# Altium PCB EtherWiz_3K4KNic.PcbDoc (part 2 of 2)
Units mil, origin at the board's own origin, x right, y up, seen from the top; angles counter-clockwise.
Board outline 3909 x 1834 mil, 4 copper layers (Top Layer, GND, 5V, Bottom Layer), stack 62.295 mil thick; 71 components, 121 nets, 446 pads, 217 vias.
Unrouted connection lines stored in the file: 7.
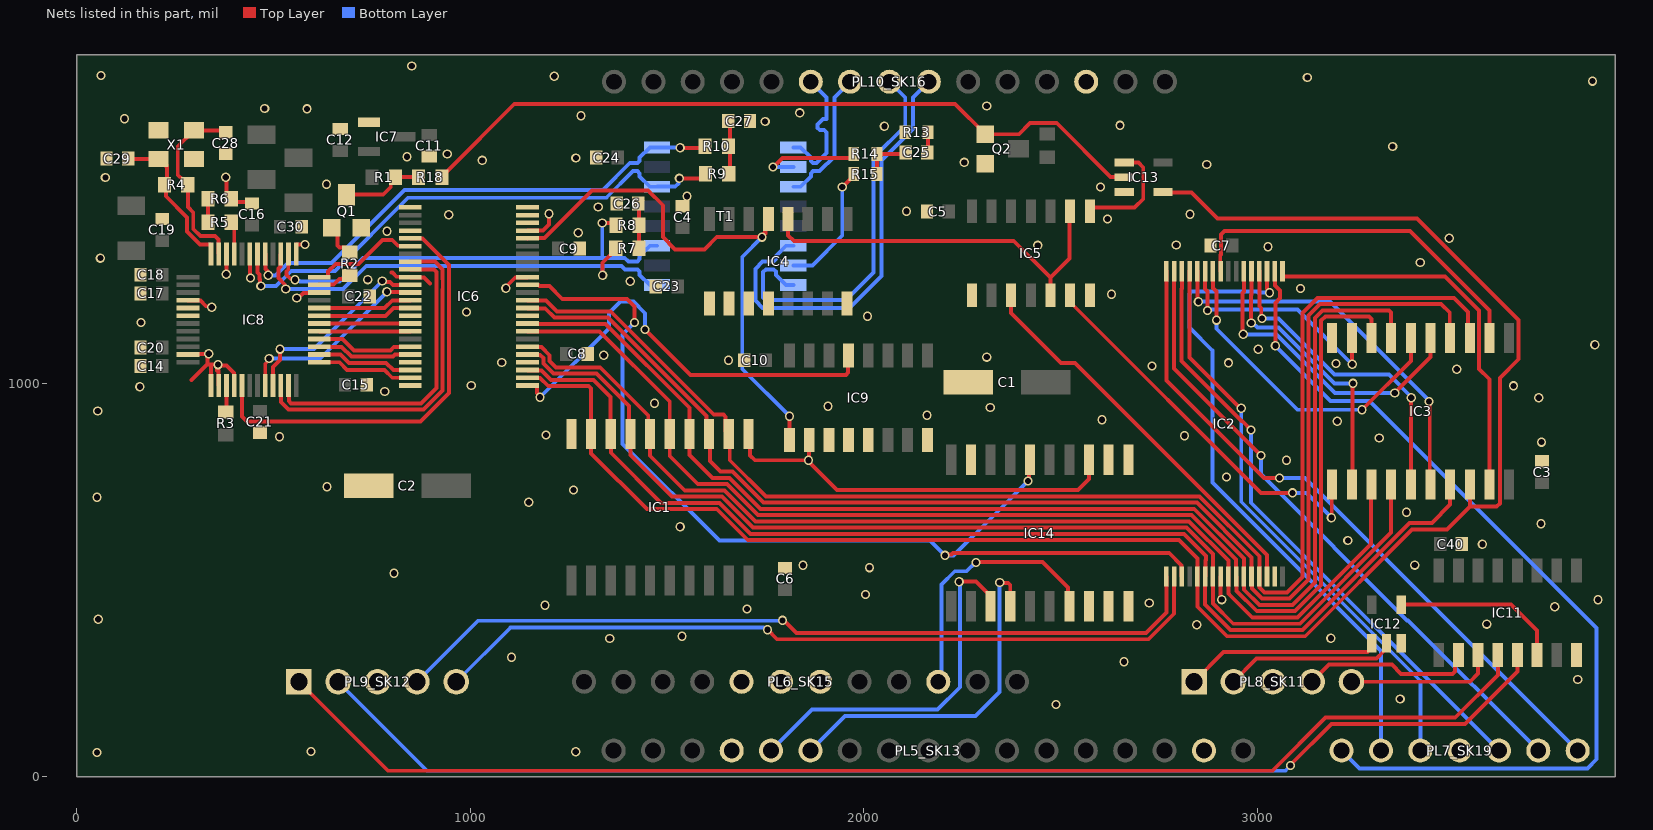
[diagram p4: the nets of this part, all layers, seen from the top]

## Via types
v1: diameter 23.62, hole 15.75, Top Layer to Bottom Layer, tented both sides, 217 vias

## Nets (pads, with @x,y where several pads share a name; then routed paths per layer and width w, separated by ;. In a path a pad name is that pad's centre, name@x,y a point inside that pad or via, vN(x,y) a via of type N, cw(c..) or ccw(c..) an arc to the next point about the centre after c; other vN are vias at no path point) (continued)
BLA3: IC2.19 IC6.14 IC14.16 | length 2582.9
  Top Layer w10: IC6.14@1145.43,1249.77 1146.34,1248.87 1173.36,1248.87 1175.33,1246.9 1200.58,1246.9 1233.39,1214.09 1397.91,1214.09 1417,1195 v1(1417,1154) ; v1(2206,562.13) 2208.61,564.74 2222.86,564.74 2226.16,568.04 2776.08,568.04 2807.15,536.97 2807.15,509.74 IC2.19@2808.06,508.83 ; v1(2417,751) 2419.5,753.5 2419.5,802.52 IC14.16@2422,805.02
  Bottom Layer w10: v1(1417,1154) 1386.91,1123.91 1386.91,845.59 1632.67,599.82 2168.32,599.82 v1(2206,562.13) 2228.13,562.13 2322.57,656.57 v1(2417,751)
BLA12: IC2.31 IC4.1 IC14.11
BLA13: IC4.2 IC5.1 IC14.12
BPR/W: IC1.1 IC9.2 IC14.13 | length 1068.4
  Top Layer w10: IC1.1@1706.6,870.57 1710.95,866.22 1710.95,816.05 1723,804 v1(1859,804) ; IC9.2@1861.2,855.29 1860.1,854.19 1860.1,805.1 v1(1859,804) ; IC14.13@2572,805.02 2572,756 2544,728 1932,728 1859,801 v1(1859,804)
CLK2: PL5_SK13.4
D0: IC1.9 IC2.21 IC3.18 IC6.2 IC13.4 | length 4631
  Top Layer w10: IC6.2@1145.43,1013.55 1146.34,1012.65 1177.37,1012.65 1197.73,992.28 1300.74,992.28 1306.6,986.43 IC1.9@1306.6,870.57 1306.6,821.4 1448.43,679.57 1625.98,679.57 1704.79,600.76 2800.49,600.76 2847.43,553.82 IC2.21@2847.43,508.83 2847.43,431.57 2922.34,356.66 3121.66,356.66 3393.44,628.44 3482.23,628.44 3539.94,686.15 ; IC13.4@2760.21,1485.6 2761.81,1484 2833,1484 2898.99,1418.01 3405.49,1418.01 3663.65,1159.85 3663.65,1060.65 3616.24,1013.24 3616.24,694.24 3608.15,686.15 3539.94,686.15 ; IC3.18@3539.94,742.49 3539.94,686.15
D1: IC1.8 IC2.22 IC3.17 IC6.3 | length 2959.2
  Top Layer w10: IC6.3@1145.43,1033.24 1146.34,1032.33 1180.18,1032.33 1204.32,1008.19 1312.81,1008.19 1355.9,965.1 1355.9,871.28 1356.95,870.22 1356.95,823.05 1484.53,695.47 1632.57,695.47 1711.38,616.66 2813.25,616.66 2869.08,560.83 2869.08,550.49 2868.02,549.43 2868.02,509.74 IC2.22@2867.11,508.83 2867.11,437.52 2932.07,372.57 3115.07,372.57 3386.85,644.35 3443.35,644.35 3489.94,690.94 IC3.17@3489.94,742.49
D2: IC1.7 IC2.23 IC3.14 IC6.5 | length 2848.6
  Top Layer w10: IC6.5@1145.43,1072.61 1146.34,1071.7 1177.02,1071.7 1185.37,1063.34 1185.37,1049.63 1210.91,1024.09 1320.91,1024.09 1402.9,942.1 1402.9,874.28 IC1.7@1406.6,870.57 1406.6,817.4 1512.62,711.38 1639.15,711.38 1717.96,632.57 2819.84,632.57 2886.8,565.61 IC2.23@2886.8,508.83 2886.8,440.33 2938.65,388.47 3108.49,388.47 3339.94,619.93 IC3.14@3339.94,742.49
D3: IC1.6 IC2.25 IC3.13 IC6.6 | length 2772.3
  Top Layer w10: IC6.6@1145.43,1092.29 1146.34,1091.39 1180.61,1091.39 1201.28,1070.72 1201.28,1056.21 1217.49,1040 1330,1040 1451.9,918.1 1451.9,875.28 IC1.6@1456.6,870.57 1456.6,815.4 1544.72,727.28 1645.74,727.28 1724.55,648.47 2826.43,648.47 2926.17,548.73 IC2.25@2926.17,508.83 2926.17,465.21 2932.23,459.15 2932.23,459.09 2986.94,404.38 3101.9,404.38 3288.96,591.44 3288.96,741.5 IC3.13@3289.94,742.49
D4: IC1.5 IC2.26 IC3.8 IC6.8 | length 3321.4
  Top Layer w10: IC6.8@1145.43,1131.66 1328.46,1131.66 1506.6,953.53 IC1.5@1506.6,870.57 1506.6,814.4 1577.81,743.19 1652.33,743.19 1731.14,664.38 2833.01,664.38 2945.85,551.54 IC2.26@2945.85,508.83 2946.76,507.93 2946.76,471.94 2998.41,420.28 3095.31,420.28 3162.19,487.16 3162.19,1158.7 3172.59,1169.09 3284.09,1169.09 3289.94,1163.24 IC3.8@3289.94,1114.54
D5: IC1.4 IC2.27 IC3.7 IC6.9 | length 3377.2
  Top Layer w10: IC6.9@1145.43,1151.35 1146.31,1150.47 1343.41,1150.47 1556.6,937.29 IC1.4@1556.6,870.57 1556.6,817.19 1614.69,759.09 1658.92,759.09 1737.73,680.28 2839.6,680.28 2965.54,554.35 IC2.27@2965.54,508.83 ; IC2.27@2965.95,508.42 2966.44,507.93 2966.44,474.75 3005,436.19 3088.72,436.19 3146.28,493.75 3146.28,1165.28 3166,1185 3334.09,1185 3339.94,1179.14 IC3.7@3339.94,1114.54
D6: IC1.3 IC2.28 IC3.4 IC6.11 | length 3533.3
  Top Layer w10: IC6.11@1145.43,1190.72 1146.34,1189.81 1190.19,1189.81 1213.62,1166.38 1350,1166.38 1600,916.38 1600,877.17 1609,868.17 1609,802 1636,775 1665.51,775 1744.32,696.19 2846.19,696.19 2985.22,557.16 IC2.28@2985.22,508.83 2986.13,507.93 2986.13,477.56 3011.59,452.09 3082.13,452.09 3130.38,500.34 3130.38,1171.87 3159.41,1200.91 3186.91,1200.91 3467.09,1200.91 3488.87,1179.13 IC3.4@3488.87,1115.61
D7: IC1.2 IC2.29 IC3.3 IC6.12 | length 3587.7
  Top Layer w10: IC6.12@1145.43,1210.4 1192.09,1210.4 1220.21,1182.28 1356.59,1182.28 1618.47,920.4 1642.95,920.4 1648.8,914.54 1648.8,878.37 IC1.2@1656.6,870.57 ; IC1.2@1659,870.57 1659,804 1750.91,712.09 2852.78,712.09 3004.91,559.97 IC2.29@3004.91,508.83 3005.81,507.93 3005.81,480.7 3018.51,468 3075.54,468 3114.47,506.93 3114.47,1178.46 3152.82,1216.81 3499.19,1216.81 3535,1181 3535,1119.48 IC3.3@3539.94,1114.54
ERX_N: IC8.5 R10.2 T1.8 | length 1309.2
  Top Layer w10: IC8.5@478.58,1328.04 478.9,1327.72 478.9,1289.55 483.81,1284.64 483.81,1276.59 v1(486.42,1273.98) ; v1(1533,1598) 1592.47,1598 R10.2@1596.47,1602
  Bottom Layer w10: v1(486.42,1273.98) 486.74,1273.66 504.66,1273.66 536.35,1305.35 647.08,1305.35 832.72,1491 1337,1491 1405,1559 1424.13,1559 1429.99,1564.86 1429.99,1573.13 1455.86,1599 T1.8@1474.36,1599 1474.86,1598.5 1532.5,1598.5 v1(1533,1598)
ERX_P: IC8.6 R9.2 T1.6 | length 1377.2
  Top Layer w10: IC8.6@458.9,1328.04 458.9,1281.27 463.7,1276.46 463.7,1264.57 464.81,1263.46 464.81,1249.31 v1(467.42,1246.71) ; v1(1531,1520.32) 1585.79,1520.32 R9.2@1597.47,1532
  Bottom Layer w10: v1(467.42,1246.71) 505.99,1246.71 544.64,1285.35 655.36,1285.35 841.01,1471 1345.28,1471 1413.28,1539 1424.13,1539 1429.99,1533.14 1429.99,1524.87 1455.86,1499 T1.6@1474.36,1499 1474.86,1499.5 1520.6,1499.5 1528.39,1507.29 1528.39,1517.71 v1(1531,1520.32)
ETX_N: IC8.2 R8.2 T1.3 | length 1182.3
  Top Layer w10: IC8.2@537.64,1328.04 537.64,1304.59 537.05,1304 537.05,1288.17 532.32,1283.45 532.32,1275.16 542.24,1265.24 551.44,1265.24 v1(554.05,1262.64) ; v1(1335,1407) 1364.15,1407 R8.2@1371.41,1399.74
  Bottom Layer w10: v1(554.05,1262.64) 556.65,1260.03 565.43,1260.03 566.72,1258.75 667.66,1258.75 726.91,1318 782.31,1318 782.59,1317.72 801.41,1317.72 801.69,1318 1335,1318 ; v1(1335,1407) 1335,1318 ; T1.3@1474.36,1349 1455.86,1349 1429.99,1323.13 1429.99,1314.86 1424.13,1309 1401.29,1309 1392.29,1318 1335,1318
ETX_P: IC8.3 R7.2 T1.1 | length 1200
  Top Layer w10: IC8.3@517.95,1328.04 517.05,1327.13 517.05,1296.46 512.32,1291.73 512.32,1266.88 528.1,1251.1 528.1,1241.9 v1(530.7,1239.29) ; v1(1336,1274) 1335.24,1274.76 1335.24,1305.81 1369.47,1340.05 R7.2@1369.47,1343
  Bottom Layer w10: v1(530.7,1239.29) 531.25,1238.75 675.95,1238.75 735.2,1298 774.02,1298 774.31,1297.72 809.69,1297.72 809.98,1298 1336,1298 ; v1(1336,1274) 1336,1298 ; T1.1@1474.36,1249 1455.86,1249 1429.99,1274.87 1429.99,1283.14 1424.13,1289 1393.01,1289 1384.01,1298 1336,1298
GND: C1.2 C2.2 C3.1 C4.1 C5.1 C6.1 C7.1 C8.1 C9.1 C10.1 C11.1 C12.1 C14.1 C15.1 C16.1 C17.1 C18.1 C19.1 C20.1 C21.1 C22.1 C23.1 C24.1 C26.1 C27.1 C28.1 C29.1 C30.1 C40.1 IC1.10 IC2.24 IC3.10 IC4.3 IC4.4 IC4.8 IC5.7 IC6.4 IC6.10 IC6.15 IC6.21 IC6.22 IC6.23 IC6.24 IC6.25 IC6.28 IC6.34 IC6.39 IC6.45 IC6.48 IC7.1 IC8.1 IC8.7 IC8.10 IC8.16 IC8.23 IC8.25 IC8.26 IC8.28 IC8.46 IC9.3 IC9.4 IC9.5 IC9.8 IC11.8 IC12.3 IC13.3 IC14.10 IC14.19 PL5_SK13.16 PL6_SK15.5 PL6_SK15.7 PL7_SK19.4 PL8_SK11.3 PL9_SK12.3 PL10_SK16.13 Q1.2 Q2.2 R6.1 R13.1 X1.2 X1.4 | length 1117.5
  Top Layer w10: IC8.23@282.2,1072.61 283.11,1073.51 v1@333.82,1073.51 ; IC8.16@282.2,1210.4 283.11,1209.5 313.79,1209.5 327.99,1195.29 340.15,1195.29 v1(342.76,1192.69) ; 291.57,1007.65 330.94,1047.02 ; v1(334.88,1074.57) v1@333.82,1073.51 ; IC8.25@340.79,994.34 340.79,1047.02 ; 355.9,1032.58 355.9,1044.41 v1(358.5,1047.02) ; 359.57,1032.58 359.57,995.24 IC8.26@360.47,994.34 ; v1(378.19,1523.39) 380.24,1521.35 380.24,1480.01 399.84,1460.4 C16.1@445.12,1460.4 ; v1(379.51,1276.71) 379.84,1277.03 379.84,1327.72 IC8.10@380.16,1328.04 ; IC8.28@399.84,994.34 398.94,995.24 398.94,1025.92 380.45,1044.41 361.11,1044.41 v1(358.5,1047.02) ; IC8.7@439.21,1328.04 440.1,1327.15 440.1,1267.94 v1(440.99,1267.05) ; IC8.1@557.32,1328.04 557.32,1351.17 558.23,1352.07 579.23,1352.07 v1(579.58,1352.42) ; v1(558.81,1216.03) 562.5,1216.03 575.65,1229.18 615,1229.18 IC8.46@615.91,1230.09 ; 799.45,1280.71 801.98,1280.71 812.32,1270.36 846.26,1270.36 IC6.34@847.17,1269.46 848.07,1268.55 882.11,1268.55 897.33,1253.33 ; v1(1090.12,1240.88) 1092.73,1243.48 1092.73,1247.43 1113.85,1268.55 1144.53,1268.55 IC6.15@1145.43,1269.46 ; IC6.21@1145.43,1387.57 1184.44,1387.57 1199.92,1403.05 v1(1199.92,1430.6) ; C4.1@1539,1449.56 1539.66,1449.56 1550.41,1460.31 v1(1550.41,1474.89) ; IC2.24@2906.48,508.83 2906.48,456.46 2909.51,453.43 v1(2909.51,449.74) ; 330.94,1047.02 340.79,1047.02 ; 330.94,1047.02 332.28,1048.35 332.28,1071.97 v1@333.82,1073.51 ; 340.79,1047.02 v1(358.5,1047.02)
  other v1: 51,61 1267.51,63.35 595,64 2488.08,183.06 3362.73,197.41 3814.19,246.69 2661,292 1104.58,303.3 1354,351 3186.73,351.41 1537.51,356.69 2846,386 3582.73,387.41 54,400 1703,426 3755.73,431.41 1189.51,435.35 2725,441 3865.73,449.41 2004,463 805.99,516.64 2014,531 1845,537 3399.73,537.41 3571.73,590.41 3230,600 1533,635 3720.73,642.41 3379,672 1148,697 51,710 1261.74,728.22 635.36,736.73 2921.73,761.41 3074.23,803.72 3722,850 3309.93,860.63 514.73,863.6 2814.73,866.41 1192,868 3203,903 2605,907 2160.45,918.16 53,929 2321.06,938.06 1909,941 1468,949 3715,963 782.31,978.62 159.92,990.6 3651,993 1002.2,994.02 3506.73,1035.41 2732.12,1043.3 3199.81,1049.81 2926.73,1051.41 1079.51,1052.35 1655.72,1058 2312,1066 1339,1071 3002,1086 3857.73,1097.41 163,1154 2009,1170 989.92,1180.6 2629,1226 3109.73,1240.41 1406,1259 739,1263 3413.73,1306.41 59.51,1317.66 3026.73,1346.41 2442,1350 2794,1351 3487.47,1368.15 1274,1382 788,1385.87 2619,1417 945,1428 2829,1429 2108,1437 1324.97,1447.79 2601.45,1498.16 634.09,1505.41 72.21,1522.77 2871.19,1555.49 2255,1561 1030,1566 1268,1572 839.01,1575.25 941.18,1582.45 3343.73,1601.41 2052,1653 2651,1655 1749,1665 120.73,1671.59 1281.22,1679.3 1836.85,1686.72 584.89,1696.97 477,1698 2312,1704 3851.73,1767.41 3126.99,1776.64 1213,1780 61,1782 851,1806
GND_CHASS: C25.1 R13.2 | length 52
  Top Layer w10: C25.1@2161.35,1586.29 2163.32,1588.26 R13.2@2163.32,1637.47
INT_3v3: IC13.2 Q2.1 R18.2 | length 1923.9
  Top Layer w10: R18.2@927.4,1523.39 927.4,1526.35 939.13,1538.08 940.12,1538.08 1111.47,1709.43 2231.69,1709.43 Q2.1@2308.61,1632.52 2393.74,1632.52 2421.99,1660.76 2490.12,1660.76 2627.04,1523.84 2665.42,1523.84 IC13.2@2670.26,1519
INT_Read_nEN: IC5.8 IC13.1 | length 283.2
  Top Layer w10: IC5.8@2574.2,1436.47 2574.2,1438.2 2581.99,1446 2688,1446 2710,1468 2710,1548 2697.6,1560.4 IC13.1@2661.79,1560.4
LA2: IC14.3 PL5_SK13.5 | length 937
  Top Layer w10: v1(2242,495) 2243,496 2284.57,496 2322,458.57 IC14.3@2322,432.98
  Bottom Layer w10: PL5_SK13.5@1764,66 1868,170 2187,170 2244,227 2244,493 v1(2242,495)
LA3: IC14.4 PL5_SK13.6 | length 903.9
  Top Layer w10: v1(2345.12,493.09) 2346,492.22 2366.14,492.22 2372,486.36 IC14.4@2372,432.98
  Bottom Layer w10: PL5_SK13.6@1864,66 1952.09,154.1 2284.1,154.1 2345.12,215.12 v1(2345.12,493.09)
LA4: IC2.18 PL9_SK12.5 | length 2016
  Top Layer w10: v1(1754.85,373.35) 1779.1,349.09 2723.59,349.09 2788.37,413.88 IC2.18@2788.37,508.83
  Bottom Layer w10: PL9_SK12.5@964,241 1102.4,379.4 1745.1,379.4 1751.16,373.35 v1(1754.85,373.35)
LA5: IC2.17 PL9_SK12.4 | length 2096.1
  Top Layer w10: v1(1793,397) 1796.69,397 1828.69,365 2717,365 2768.69,416.68 IC2.17@2768.69,508.83
  Bottom Layer w10: PL9_SK12.4@864,241 1019.06,396.06 1792.06,396.06 v1(1793,397)
LA6: IC2.16 PL7_SK19.7 | length 1712.6
  Top Layer w10: IC2.16@2768.69,1284.43 2768.69,1006.92 3016.61,759 v1(3056,759)
  Bottom Layer w10: v1(3056,759) 3121,759 PL7_SK19.7@3814,66
LA7: IC2.15 PL7_SK19.6 | length 1603.1
  Top Layer w10: IC2.15@2788.37,1284.43 2788.37,1036.63 v1(3009,816)
  Bottom Layer w10: v1(3009,816) 3009,768.87 3380.75,397.13 3382.87,397.13 PL7_SK19.6@3714,66
LA8: IC2.14 PL7_SK19.5 | length 1554.5
  Top Layer w10: IC2.14@2808.06,1284.43 2808.06,1240.62 2806.83,1239.4 2806.83,1056.04 2959.35,903.52 2961.48,903.52 v1(2984,881)
  Bottom Layer w10: v1(2984,881) 2984,696 PL7_SK19.5@3614,66
LA9: IC2.13 PL7_SK19.3 | length 1462.9
  Top Layer w10: IC2.13@2827.74,1284.43 2827.74,1230.94 2827.28,1230.48 2827.28,1065.59 2956.87,936 v1(2959,936)
  Bottom Layer w10: v1(2959,936) 2959,698.51 3414,243.51 PL7_SK19.3@3414,66
LA10: IC2.3 PL7_SK19.2 | length 1626.7
  Top Layer w10: IC2.3@3024.59,1284.43 3024.59,1239.83 3031.02,1233.4 v1(3031.02,1229.72)
  Bottom Layer w10: v1(3031.02,1229.72) 3001.84,1229.72 2999.21,1232.35 2833.14,1232.35 2827.28,1226.5 2827.28,1140.84 2885.81,1082.31 2885.81,747.19 3314,319 PL7_SK19.2@3314,66
LA11: IC2.2 PL7_SK19.1 | length 2323.9
  Top Layer w10: IC2.2@3044.28,1284.43 3044.28,1248.59 3058,1234.86 3058,1216 3045.69,1203.69 v1(3045.69,1094.69)
  Bottom Layer w10: v1(3045.69,1094.69) 3107.18,1033.2 3185.45,954.93 3285.07,954.93 3862,378 3862,44 3839,21 3259,21 PL7_SK19.1@3214,66
LA12: IC14.9
LA13: IC14.8
LA14: IC11.5 PL9_SK12.2 | length 3238
  Top Layer w10: v1(3084,28) 3084,30 3188,134 3528,134 3661,267 IC11.5@3661,308.72
  Bottom Layer w10: PL9_SK12.2@664,241 890.09,14.91 3070.91,14.91 v1(3084,28)
LA15: IC11.4 PL9_SK12.1 | length 3292.1
  Top Layer w10: PL9_SK12.1@564,241 790.09,14.91 3037.91,14.91 3172.91,149.91 3502.91,149.91 3611,258 IC11.4@3611,308.72
LA16: IC11.3 PL8_SK11.5 | length 377.4
  Top Layer w10: PL8_SK11.5@3239,241 3540,241 3561,262 IC11.3@3561,308.72
LA17: IC11.2 PL8_SK11.4 | length 438.8
  Top Layer w10: PL8_SK11.4@3139,241 3182.39,284.39 3341.62,284.39 3365.01,261 3496.36,261 3502.22,266.86 3502.22,299.94 IC11.2@3511,308.72
LA18: IC12.2 PL8_SK11.2 | length 437.4
  Top Layer w10: PL8_SK11.2@2939,241 2998.29,300.29 3302.96,300.29 3321.19,318.52 3321.19,331.98 IC12.2@3328,338.79
LA21: IC12.1 PL8_SK11.1 | length 499
  Top Layer w10: PL8_SK11.1@2839,241 2914.2,316.2 3279.82,316.2 3290.6,326.98 IC12.1@3290.6,338.79
LINK: IC8.17
NetC25_2: C25.2 R14.1 R15.1 | length 125.6
  Top Layer w10: R15.1@2033.4,1531.17 R14.1@2033.4,1582.35 2102.3,1582.35 C25.2@2106.24,1586.29
NetC26_2: C26.2 R7.1 R8.1 | length 116.1
  Top Layer w10: R7.1@1428.72,1342.43 R8.1@1428.72,1401.49 C26.2@1428.72,1458.57
NetC27_2: C27.2 R9.1 R10.1 | length 137.2
  Top Layer w10: R9.1@1659.25,1532 1659.25,1598.28 R10.1@1655.53,1602 1659.44,1605.91 C27.2@1659.44,1666
NetC28_2: C28.2 IC8.11 R4.2 X1.1 | length 481
  Top Layer w10: IC8.11@360.47,1328.04 359.57,1328.95 359.57,1364.85 350.63,1373.79 313.55,1373.79 295.67,1391.67 295.67,1433.38 281.73,1447.32 281.73,1506.66 270,1518.39 267.05,1518.39 256.14,1529.3 256.14,1601.15 X1.1@297.48,1642.49 373.27,1642.49 C28.2@378.19,1637.57
NetC29_2: C29.2 IC8.12 R4.1 X1.3 | length 397.9
  Top Layer w10: C29.2@130.16,1570.64 131.14,1569.65 211.85,1569.65 227.52,1553.98 227.52,1549.19 228.58,1548.13 228.58,1509.61 R4.1@222.68,1503.71 225.91,1500.47 225.91,1474.88 279.76,1421.03 279.76,1385.08 312.77,1352.07 339.88,1352.07 340.79,1351.17 IC8.12@340.79,1328.04
NetIC8_9: IC8.9 R5.2 | length 84.4
  Top Layer w10: R5.2@391.97,1409.22 399.84,1401.35 IC8.9@399.84,1328.04
NetIC8_27: IC8.27 R3.1 | length 68.2
  Top Layer w10: R3.1@378.19,926.94 380.16,928.91 IC8.27@380.16,994.34
NetIC8_47: IC8.47 R2.1 | length 89.2
  Top Layer w10: IC8.47@615.91,1249.77 616.81,1250.68 652.72,1250.68 666.65,1264.61 679.45,1264.61 691.18,1276.35 R2.1@691.18,1279.3
NetIC11_6: IC11.6 IC12.4 | length 435.3
  Top Layer w10: IC12.4@3365.4,437.21 3644.79,437.21 3711,371 IC11.6@3711,308.72
NetQ1_1: Q1.1 R2.2 | length 90.7
  Top Layer w10: Q1.1@644.24,1394.37 645.06,1394.37 661.65,1377.78 661.65,1350.17 667.64,1344.18 681.42,1344.18 R2.2@693.15,1332.45
NetQ1_3: Q1.3 R1.1 R18.1 | length 209.9
  Top Layer w10: Q1.3@685.03,1478.78 778.46,1478.78 797.56,1497.88 797.56,1511.66 R1.1@809.29,1523.39 R18.1@868.35,1523.39
NetR5_1: R5.1 R6.2 | length 59.1
  Top Layer w10: R5.1@332.91,1409.22 R6.2@332.91,1468.28
NetR11_1: 
NetR12_1: 
NetR14_2: R14.2 T1.10 | length 271.9
  Top Layer w10: v1(1769,1549) 1770.5,1549 1793.5,1572 1965.57,1572 1974.35,1580.78 R14.2@1974.35,1582.35
  Bottom Layer w10: v1(1769,1549) T1.10@1820.82,1549
NetR15_2: R15.2 T1.15 | length 324
  Top Layer w10: v1@1945.8,1498.69 1974.35,1527.24 R15.2@1974.35,1531.17
  Bottom Layer w10: T1.15@1820.82,1299 1869,1299 1945,1375 v1@1945,1499
  other v1: 1945.08,1498.51
PA0: IC2.1 IC3.19 | length 1001.4
  Top Layer w10: IC2.1@3063.96,1284.43 3063.96,1271.55 3064.87,1270.65 3477.35,1270.65 3563.65,1184.35 3563.65,1036.11 3589.94,1009.81 IC3.19@3589.94,742.49
PA1: IC2.12 IC3.16 | length 983.6
  Top Layer w10: IC2.12@2847.43,1284.43 2848.33,1283.52 2848.33,1208.67 v1(2850,1207) ; v1(3436,953) 3437.97,951.03 3437.97,744.46 IC3.16@3439.94,742.49
  Bottom Layer w10: v1(2850,1207) 3185,1207 3436,956 v1(3436,953)
PA2: IC2.4 IC3.15 | length 807.9
  Top Layer w10: IC2.4@3004.91,1284.43 3004.91,1195.81 3009.91,1190.81 3009.91,1165.97 v1(3011.87,1164) ; IC3.15@3389.94,742.49 3390.47,743.02 3390.47,962.47 v1(3391,963)
  Bottom Layer w10: v1(3011.87,1164) 3053.49,1164 3195.49,1022 3334.13,1022 3391,965.13 v1(3391,963)
PA3: IC2.5 IC3.12 | length 712.1
  Top Layer w10: v1(2984.47,1153) 2984.32,1153.16 2984.32,1223.95 2985.22,1224.86 IC2.5@2985.22,1284.43 ; IC3.12@3239.94,742.49 3241.47,744.02 3241.47,997.76 v1(3243,999.28)
  Bottom Layer w10: v1(2984.47,1153) 2988.16,1153 2999.88,1141.28 3053.72,1141.28 3195.72,999.28 v1(3243,999.28)
PA4: IC2.11 IC3.9 | length 596.2
  Top Layer w10: IC2.11@2867.11,1284.43 2867.11,1238.87 2873.17,1232.81 2873.17,1184.46 v1(2873,1184.28) ; IC3.9@3239.94,1114.54 3240.47,1114.01 3240.47,1048.53 v1(3241,1048)
  Bottom Layer w10: v1(2873,1184.28) 2875.43,1186.72 3102.28,1186.72 v1(3241,1048)
PA5: IC2.10 IC3.6 | length 839.3
  Top Layer w10: IC2.10@2886.8,1284.43 2886.8,1241.68 2896,1232.48 v1(2896,1160) ; v1(3266,932.21) 3389.94,1056.16 IC3.6@3389.94,1114.54
  Bottom Layer w10: v1(2896,1160) 2895.81,1159.81 2895.81,1138.19 3101.79,932.21 v1(3266,932.21)
PA6: IC2.6 IC3.5 | length 786.8
  Top Layer w10: v1(2964,1124) 2961.76,1126.24 2961.76,1228.7 2965.54,1232.48 IC2.6@2965.54,1284.43 ; v1(3349,975) 3439.94,1065.94 IC3.5@3439.94,1114.54
  Bottom Layer w10: v1(2964,1124) 3048.51,1124 3197.51,975 v1(3349,975)
PA7: IC2.9 IC3.2 | length 933.6
  Top Layer w10: IC2.9@2906.48,1284.43 2905.57,1285.33 2905.57,1325.18 2907.54,1327.15 2907.54,1377.68 2916.06,1386.2 3387.8,1386.2 3589.94,1184.06 IC3.2@3589.94,1114.54
PR/W: IC14.7 PL6_SK15.10 | length 671.1
  Top Layer w10: v1(2285,544) 2286,545 2454,545 2518.5,480.5 2518.5,436.48 IC14.7@2522,432.98
  Bottom Layer w10: PL6_SK15.10@2189,241 2196.72,248.72 2196.72,487.72 2230.87,521.87 2261.21,521.87 2283.35,544 v1(2285,544)
REF8M: PL6_SK15.6
ROM_Latch_nEN: IC3.11 IC5.6 | length 993.2
  Top Layer w10: IC5.6@2524.2,1222.93 2531.99,1215.13 2531.99,1197.91 3008.9,721 v1(3089,721) ; v1(3188,658) 3188.97,658.97 3188.97,741.52 IC3.11@3189.94,742.49
  Bottom Layer w10: v1(3089,721) 3125,721 v1(3188,658)
ROM_Latch_nSel: IC4.12 IC5.5 IC5.9 | length 987.3
  Top Layer w10: IC4.12@1807.46,1417.3 1807.46,1375.57 1821.83,1361.2 2380.89,1361.2 2474.2,1267.89 ; IC5.5@2474.2,1222.93 2474.2,1267.89 ; IC5.9@2524.2,1436.47 2523,1435.28 2523,1316.69 2474.2,1267.89
ROM_nCS: IC2.30 IC5.3 | length 1004.2
  Top Layer w10: IC5.3@2374.2,1222.93 2374.2,1177.8 2501,1051 2536.37,1051 3024.59,562.78 IC2.30@3024.59,508.83
RX_N: PL10_SK16.6 T1.9 | length 344.9
  Bottom Layer w10: T1.9@1820.82,1599 1839.32,1599 1865.19,1573.13 1865.19,1564.86 1871.05,1559 1879.33,1559 1905,1584.67 1905,1637.14 1899.14,1643 1888,1643 1882.14,1648.86 1882.14,1657.14 1896,1671 1905,1671 1905,1726 PL10_SK16.6@1865,1766
RX_P: PL10_SK16.7 T1.11 | length 347.3
  Bottom Layer w10: T1.11@1820.82,1499 1839.32,1499 1865.19,1524.87 1865.19,1533.14 1871.05,1539 1887.62,1539 1925,1576.38 1925,1726 PL10_SK16.7@1965,1766
SPEED: IC8.18
TX_N: PL10_SK16.9 T1.14 | length 1112.1
  Bottom Layer w10: T1.14@1820.82,1349 1802.32,1349 1776.45,1323.13 1776.45,1314.86 1770.59,1309 1742.72,1309 1724,1290.28 1724,1209.72 1742.72,1191 1963.28,1191 2044.86,1272.57 2044.86,1565.44 2125,1645.58 2125,1726 PL10_SK16.9@2165,1766
TX_P: PL10_SK16.8 T1.16 | length 1012.7
  Bottom Layer w10: T1.16@1820.82,1249 1802.32,1249 1776.45,1274.87 1776.45,1283.14 1770.59,1289 1751,1289 1744,1282 1744,1218 1751,1211 1955,1211 2024.86,1280.86 2024.86,1573.72 2105,1653.87 2105,1726 PL10_SK16.8@2065,1766
Wiz5_PR/W: IC6.1 IC9.13 | length 1110.1
  Top Layer w10: IC6.1@1145.43,993.87 1168.56,993.87 1169.47,992.96 1169.47,975.22 1177,967.69 v1(1177,964) ; v1(1443.44,1136.44) 1558.87,1021 1954.24,1021 1960.1,1026.86 1960.1,1068.76 IC9.13@1961.2,1069.86
  Bottom Layer w10: v1(1177,964) 1352,1139 1352,1178 1381,1207 1414,1207 1443.44,1177.56 v1(1443.44,1136.44)
Wiz_A0: IC6.36 IC8.32 | length 502.2
  Top Layer w10: IC8.32@478.58,994.34 478.58,1049.24 488.43,1059.08 v1(488.43,1062.76) ; v1(787.64,1232.06) 788.7,1230.99 846.26,1230.99 IC6.36@847.17,1230.09
  Bottom Layer w10: v1(488.43,1062.76) 618.35,1062.76 v1(787.64,1232.06)
Wiz_A1: IC6.35 IC8.33 | length 506.4
  Top Layer w10: IC8.33@498.27,994.34 498.27,1040.48 515.98,1058.2 v1(515.98,1086.39) ; v1(775.83,1259.61) 778.43,1257.01 795.89,1257.01 803.13,1249.77 IC6.35@847.17,1249.77
  Bottom Layer w10: v1(515.98,1086.39) 602.6,1086.39 v1(775.83,1259.61)
Wiz_D0: IC6.47 IC8.37 | length 247.6
  Top Layer w10: IC8.37@615.91,1052.92 667.01,1052.92 686.69,1033.24 781.73,1033.24 801.42,1013.55 IC6.47@847.17,1013.55
Wiz_D1: IC6.46 IC8.38 | length 247.6
  Top Layer w10: IC8.38@615.91,1072.61 669.82,1072.61 690.88,1051.54 785.92,1051.54 804.23,1033.24 IC6.46@847.17,1033.24
Wiz_D2: IC6.44 IC8.39 | length 243.7
  Top Layer w10: IC8.39@615.91,1092.29 672.62,1092.29 697.47,1067.45 803.64,1067.45 808.79,1072.61 IC6.44@847.17,1072.61
Wiz_D3: IC6.43 IC8.40 | length 246.8
  Top Layer w10: IC8.40@615.91,1111.98 675.43,1111.98 704.05,1083.35 797.05,1083.35 805.08,1091.39 846.26,1091.39 IC6.43@847.17,1092.29
Wiz_D4: IC6.41 IC8.41 | length 231.3
  Top Layer w10: IC8.41@615.91,1131.66 IC6.41@847.17,1131.66
Wiz_D5: IC6.40 IC8.42 | length 231.3
  Top Layer w10: IC8.42@615.91,1151.35 IC6.40@847.17,1151.35
Wiz_D6: IC6.38 IC8.43 | length 239.4
  Top Layer w10: IC8.43@615.91,1171.03 784.54,1171.03 804.23,1190.72 IC6.38@847.17,1190.72
Wiz_D7: IC6.37 IC8.44 | length 239.4
  Top Layer w10: IC8.44@615.91,1190.72 781.73,1190.72 801.42,1210.4 IC6.37@847.17,1210.4
Wiz_nRD: IC6.32 IC8.34 | length 880.1
  Top Layer w10: IC8.34@517.95,994.34 518.86,993.43 518.86,951.64 537.81,932.69 858.84,932.69 880.84,932.69 929.53,981.37 929.53,1238.41 929.68,1238.56 929.68,1264.92 929.53,1265.07 929.53,1288.97 909.67,1308.83 IC6.32@847.17,1308.83
Wiz_nRst: IC6.30 IC8.48 | length 283.9
  Top Layer w10: IC8.48@615.91,1269.46 637.25,1269.46 638.16,1270.36 638.16,1283.36 657.72,1302.92 715.92,1302.92 776.15,1363.15 801.41,1363.15 815.46,1349.1 846.26,1349.1 IC6.30@847.17,1348.2
Wiz_nSel: IC6.29 IC8.29 | length 1092.2
  Top Layer w10: IC8.29@419.53,994.34 419.53,915.4 432.68,902.25 872.9,902.25 945.43,974.78 945.43,1231.82 945.59,1231.98 945.59,1271.5 945.43,1271.66 945.43,1300.29 878.75,1366.98 848.07,1366.98 IC6.29@847.17,1367.88
Wiz_nSel5: IC4.13 IC6.20 IC9.1 | length 1450.5
  Top Layer w10: IC6.20@1145.43,1367.88 1146.34,1368.79 1188.15,1368.79 1309.36,1490 1451,1490 1489,1452 1489,1371 1520.44,1339.56 1594.56,1339.56 1626,1371 v1(1741,1371) ; IC4.13@1749.63,1409.46 1749.63,1379.63 v1(1741,1371) ; IC4.13@1757.46,1417.3 1748.68,1408.52 1748.68,1382.37 1741,1374.69 v1(1741,1371) ; v1(1811,916) 1811.1,915.9 1811.1,855.39 IC9.1@1811.2,855.29
  Bottom Layer w10: v1(1741,1371) 1690.81,1320.81 1690.81,1036.19 v1(1811,916)
Wiz_nWR: IC6.33 IC8.35 | length 797.9
  Top Layer w10: IC8.35@537.64,994.34 538.54,993.43 538.54,954.45 544.4,948.59 874.25,948.59 913.62,987.96 913.62,1244.99 913.78,1245.15 913.78,1258.33 913.62,1258.49 913.62,1282.38 907.76,1288.24 848.07,1288.24 IC6.33@847.17,1289.14
pads on no net: IC4.7 IC4.9 IC4.10 IC4.11 IC4.14 IC4.15 IC6.26 IC6.27 IC8.19 IC8.20 IC8.21 IC8.30 IC9.7 IC9.9 IC9.10 IC9.11 IC9.12 IC9.14 IC9.15 IC11.7 IC11.9 IC11.10 IC11.11 IC11.12 IC11.13 IC11.14 PL10_SK16.1 PL10_SK16.2 PL10_SK16.3 PL10_SK16.4 PL10_SK16.5 PL10_SK16.10 PL10_SK16.11 PL10_SK16.12 PL10_SK16.14 PL10_SK16.15 T1.4 T1.5 T1.12 T1.13
copper on no net: | length 86.4
  GND w10: 374.25,1196.62 374.25,1230.39 411.46,1267.6
  other v1: 275.83,1338.35

## Polygon pours and split planes (outlines as drawn)
1v2d on Top Layer "1V2D_L01_P000" (solid, remove dead copper, pour order 0): 327.91,1286.33 572.91,1286.33 572.91,1036.33 327.91,1036.33
GND on Top Layer "GND_L01_P005" (solid, remove dead copper, pour order 5): 0,0 3909,0 3909,1834 0,1834
3v3 on 5V "3V3_L03_P004" (solid, remove dead copper, pour order 4): -285,1834 -283,1832 895,1832 895,827 -283,827
5V on 5V "5V_L03_P011" (solid, pour order 11): 0,0 3909,0 3909,1834 0,1834
GND on GND "GND_L02_P002" (solid, pour order 2): 0,0 3909,0 3909,1834 0,1834
GND on Bottom Layer "GND_L04_P010" (solid, remove dead copper, pour order 10): 0,0 3909,0 3909,1834 0,1834

## Keep-outs
Keep-Out Layer:
  the board outline again, w8

## Other copper
Top Layer:
  text ".PCB_RevNo" at 168,634 h60 r90
  text ".Project_Title" at 170,115 h60 r90

## Silkscreen, mask and mechanical layers (free items; w line width, h text height)
Top Overlay:
  text ".Project_Title" at 2956.69,1660.68 h118.11
  text ".PCB_RevNo" at 3582.69,1478.68 h118.11
  text "(C) IanJ '26" at 3165,1343 h60
Board Shape:
  the board outline again, w8